# Altium PCB LED.PcbDoc
Units mm, origin at the board's own origin, x right, y up, seen from the top; angles counter-clockwise.
Board outline 30 x 30 mm, 2 copper layers (Top Layer, Bottom Layer), stack 1.671 mm thick; 5 components, 4 nets, 10 pads, 1 vias.
Unrouted connection lines stored in the file: 1.
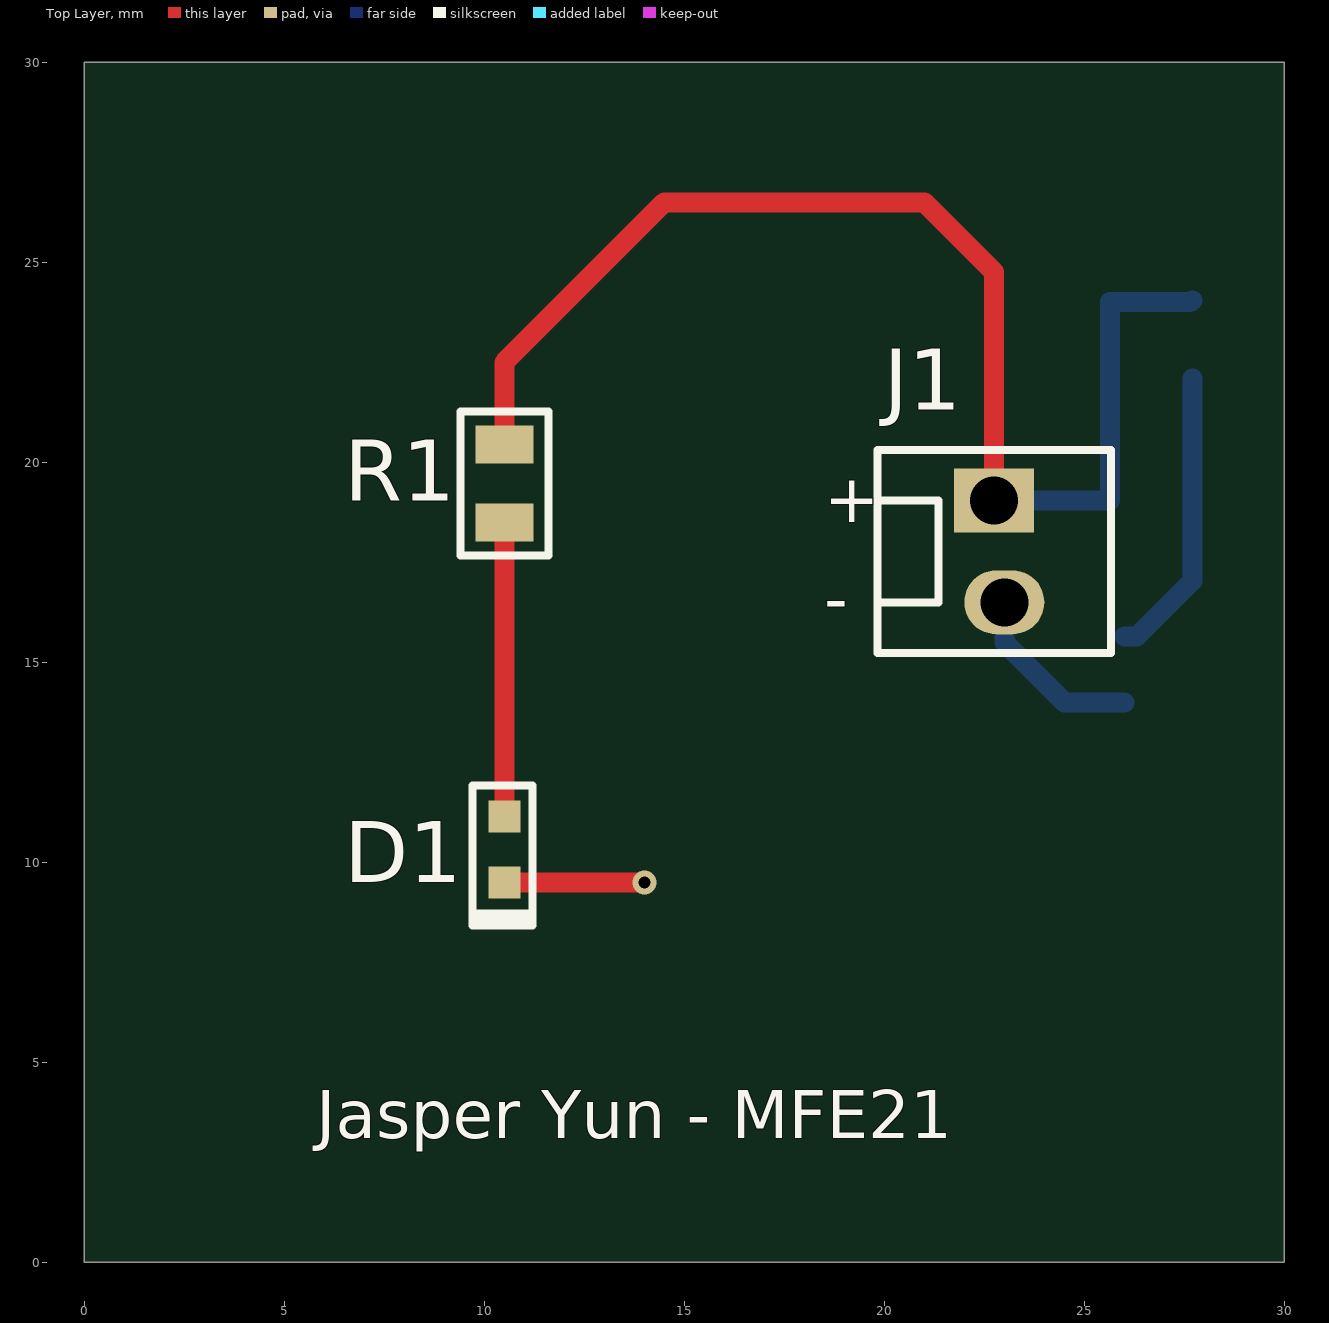
[diagram p0: Top Layer view]
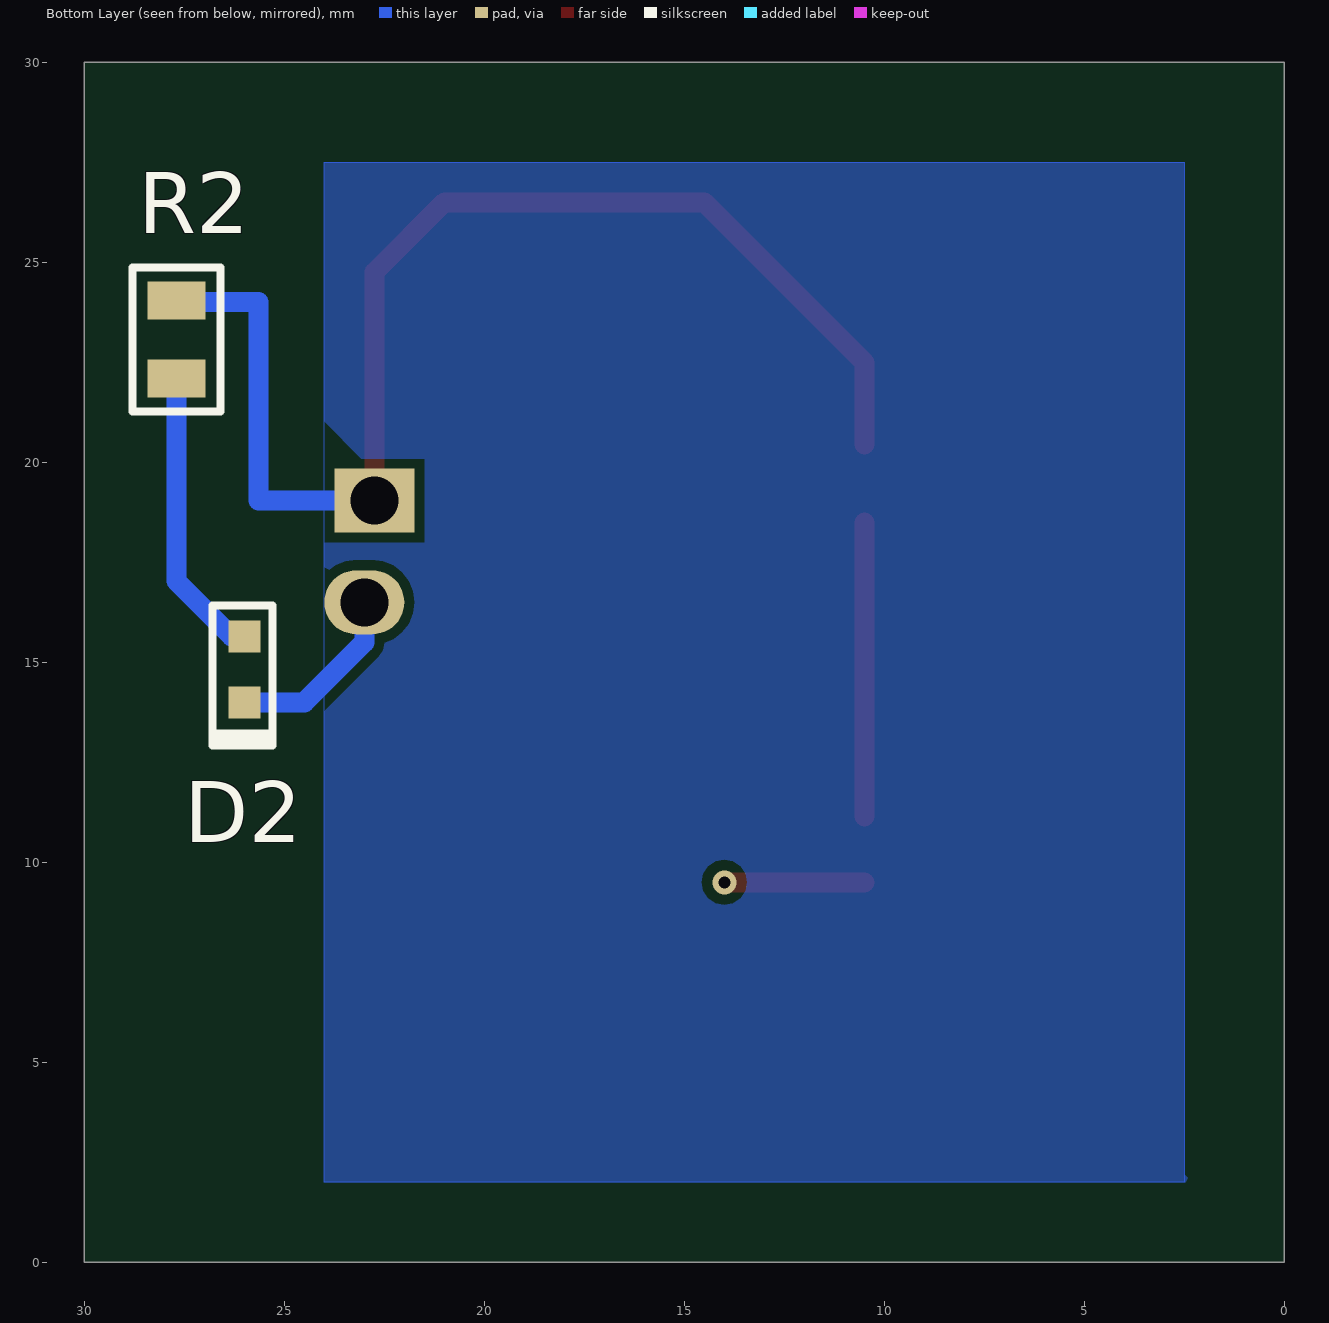
[diagram p1: Bottom Layer view, seen from below]
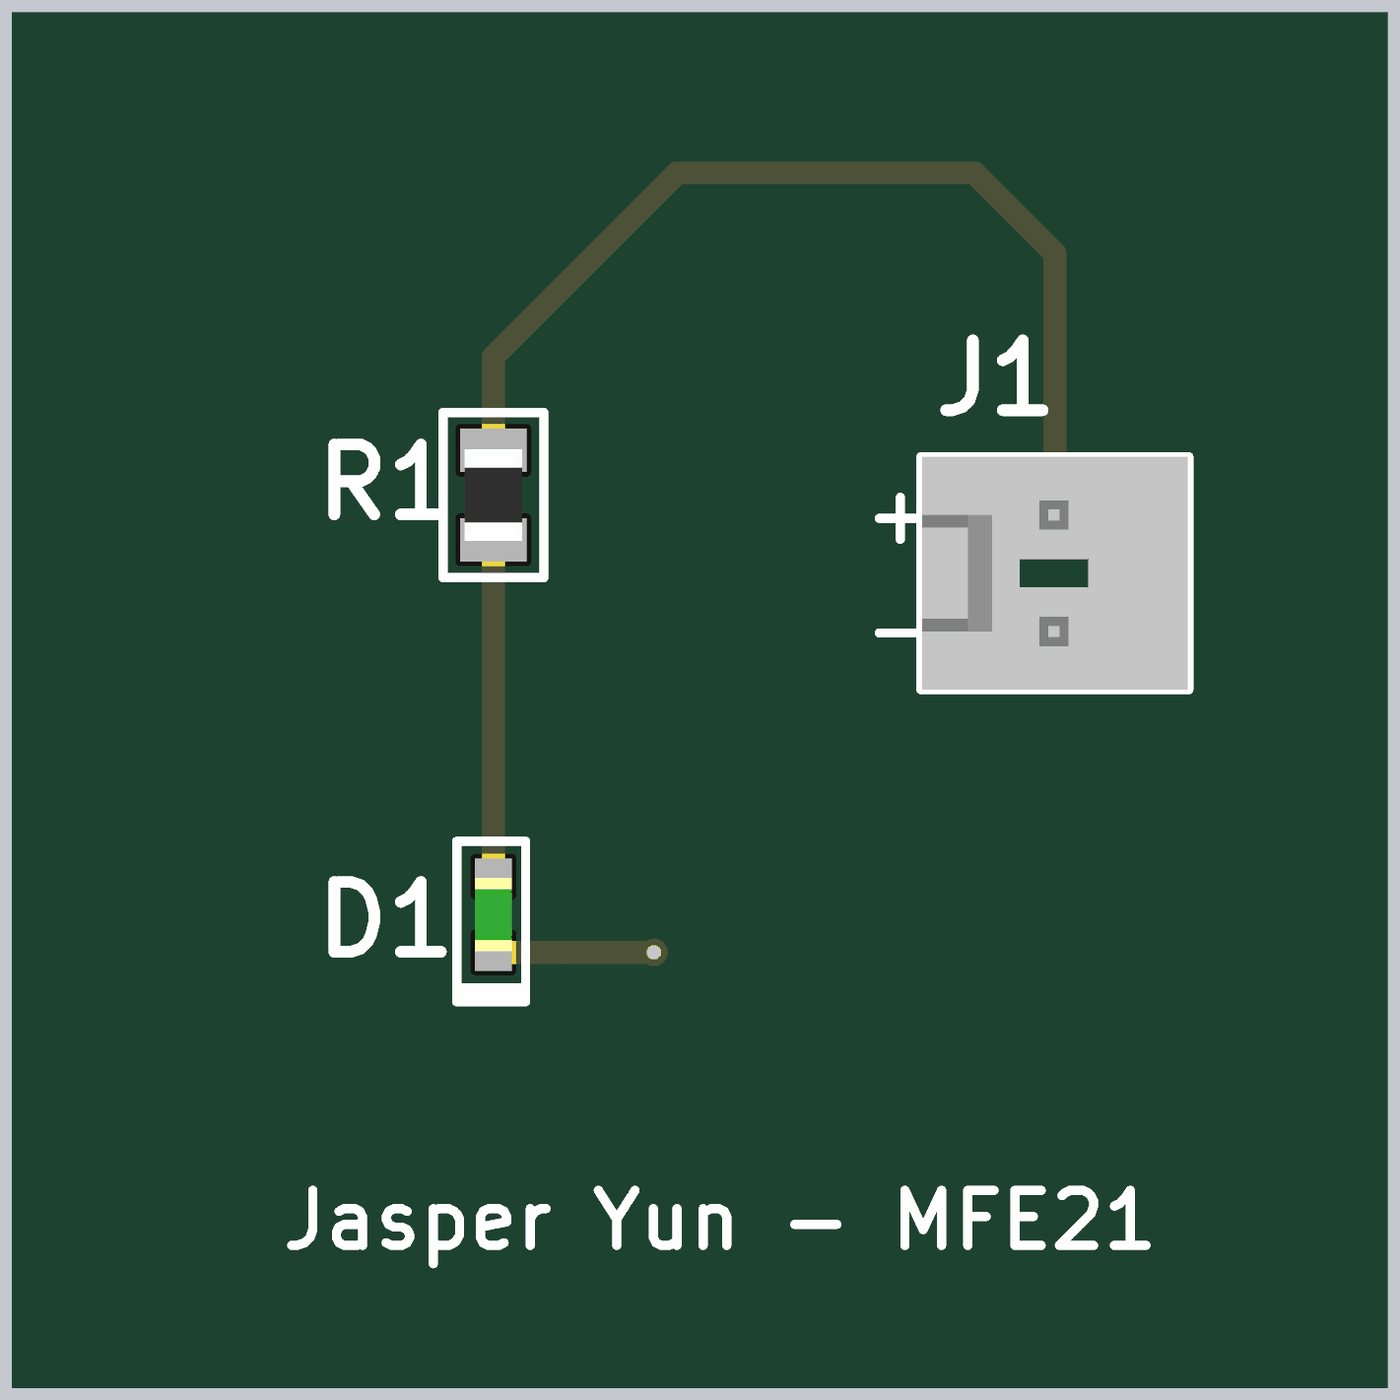
[diagram p2: 3D render of the assembled board from above, using the file's embedded part models]

## Layer stack, top to bottom
Top Solder: solder mask 0.0102, Solder Resist, Dk 3.5
Top Layer: signal copper 0.0356
Dielectric 1: dielectric 1.6, FR-4, Dk 4.8
Bottom Layer: signal copper 0.0356
Bottom Solder: solder mask 0.0102, Solder Resist, Dk 3.5

## Board outline
0,30 30,30 30,0 0,0

## Design rules (kind name [scope] priority, off if disabled: settings)
Clearance [All] p1: gap=0.254 ignorepadtopadclearanceinfootprint=FALSE except(0: Arc-Hole Track-Hole SMDPad-Hole THPad-Hole Via-Hole Fill-Hole Poly-Hole Region-Hole Text-Hole)
PolygonConnect [All] p1: connectstyle=Relief reliefconductorwidth=0.254 reliefentries=4 polygonreliefangle="90 Angle" airgapwidth=0.254
RoutingVias [All] p1: holewidth=0.3 width=0.6 viastyle="Through Hole" minholewidth=0.3 minwidth=0.6 maxholewidth=0.3 maxwidth=0.6
SilkToSolderMaskClearance [IsPad] p1: minsilkscreentomaskgap=0.1 clearancetoexposedcopper=TRUE
SolderMaskExpansion [All] p1: expansion=0.102
Width [All] p1: maxlimit=1 minlimit=0.3 preferedwidth=0.5
29 further rules are at their usual default settings.

## Components (designator, comment, footprint, x,y, rotation, side; value= is the part's Value field where it differs from the comment)
D1 "AMBER" LED0603A 10.5,10.325 r90 top
D2 "AMBER" LED0603A 26,14.825 r90 bottom
J1 "1x2 Header" HDR1X2 22.746,19.04 r0 top
R1 "360R" R0805 10.5,19.475 r90 top
R2 "360R" R0805 27.7,23.075 r90 bottom

## Footprints (in the part's own frame and the unit in brackets; to place one, negate y for a bottom-side part, rotate by r counter-clockwise, add the part's x,y. Pads: shape width x height; smd on the part's side, far side on the other; paste and mask are expansions set on the pad)
HDR1X2 [mm]
  rect 2x1.6 hole 1.2: 1(0,0)
  oval 2x1.6 hole 1.2: 2(0.254,-2.54)
  silkscreen extent -2.92,-3.81 2.92,1.27, body extent -2.9,-3.81 2.9,1.27, height 11.71
LED0603A [mm]
  rect 0.8x0.8 smd: 1(-0.825,0) 2(0.825,0)
  silkscreen extent -1.9,-0.7 1.6,0.8, body extent -0.8,-0.4 0.8,0.4, height 0.4
R0805 [mm]
  rect 0.95x1.45 smd: 1(-0.975,0) 2(0.975,0)
  silkscreen extent -1.8,-1.1 1.8,1.1, body extent -1,-0.62 1,0.62, height 0.61

## Part data
D1 D2: library part LNJ437W84RA, "LED AMBER ESS II SMD", Case/Package=0603, Case Code (Metric)=1608, Color=Orange, Forward Current=5mA, Forward Voltage=1.95V, Manufacturer="Panasonic SSG", Max Operating Temperature=85°C, Max Power Dissipation=55mW, Min Operating Temperature=-30°C, Package Quantity=5000, Reverse Voltage=4V, Supplier Part Number 1=LNJ437W84RADKR-ND, Case Code (Imperial)=0603, Category=Optoelectronics, ComponentLink1Description=http://www.mouser.com/ds/2/315/LNJ437W84RA_AEK-226228.pdf?src-supplier=Mouser, ComponentLink1URL=http://www.mouser.com/ds/2/315/LNJ437W84RA_AEK-226228.pdf?src-supplier=Mouser, ComponentLink2Description=http://www.semicon.panasonic.co.jp/ds4/LNJ437W84RA_AEK.pdf?src-supplier=Element14, ComponentLink2URL=http://www.semicon.panasonic.co.jp/ds4/LNJ437W84RA_AEK.pdf?src-supplier=Element14, Dominant Wavelength=590nm, Height=0.2mm, Illumination Color=Orange, Lead Free="Lead Free", Length=1.6mm, Lens Style=Rectangular, Luminous Intensity=25mcd, Manufacturer Part Number=LNJ437W84RA, Mount="Surface Mount", Number of LEDs=1, Number of Pins=2, Packaging="Tape and Reel", Pricing 1="1=0.32, 10=0.212, 100=0.1521, 500=0.12762, 1000=0.11988 (USD)", REACH SVHC="No SVHC", Stock 1=200969, Supplier 1=Digi-Key, Test Current=5mA, Wavelength=590nm, Width=0.8mm
J1: library part "22-29-2021 (2)", "Headers & Wire Housings 2 PIN F/LK HEADER", Color=White, Flammability Rating="UL94 V-0", Insulation Color=Natural, Manufacturer=Molex, Manufacturer Part Number=22-29-2021, Max Operating Temperature=80°C, Supplier Part Number 1=WM2744-ND, Voltage Rating (DC)=250V, Category=Connectors, ComponentLink1Description=https://www.molex.com/pdm_docs/sd/022292021_sd.pdf?src-supplier=Digi-Key, ComponentLink1URL=https://www.molex.com/pdm_docs/sd/022292021_sd.pdf?src-supplier=Digi-Key, Connector Type="Header,Male Pin", Contact Material=Brass, Contact Mating Length=0.295inch, Contact Plating=Gold, Contact Post Length=0.14inch, Contact Shape=Square, Fastening Type=Friction, Gender=Male, Glow Wire Compliant=Non-compliant, Halogen Free="Low Halogen", Insulation Height=0.461inch, Insulation Material=Nylon, Lead Free="Lead Free", Mount="Through Hole", Number of Positions=2, Number of Rows=1, Packaging=Bag, Pricing 1="1=0.48, 10=0.452, 100=0.3163, 500=0.27112, 1000=0.22593, 5000=0.19365, 10000=0.18074 (USD)", Stock 1=2431, Supplier 1=Digi-Key, Termination=Solder
R1 R2: library part CRCW0805360RFKEA, "RES SMD 360 OHM 1% 1/8W 0805", Case/Package=0805, Case Code (Metric)=2012, Manufacturer=Vishay, Max Operating Temperature=155°C, Max Power Dissipation=125mW, Min Operating Temperature=-55°C, Package Quantity=10, Supplier Part Number 1=541-360CDKR-ND, Temperature Coefficient=100ppm/°C, Tolerance=1%, Voltage Rating=150V, Case Code (Imperial)=0805, Category=Resistors, ComponentLink1Description=http://www.vishay.com/docs/20035/dcrcwe3.pdf?src-supplier=Digi-Key, ComponentLink1URL=http://www.vishay.com/docs/20035/dcrcwe3.pdf?src-supplier=Digi-Key, Composition="Thick Film", Contact Plating=Tin, Depth=1.25mm, Features="Automotive AEC-Q200", Height=0.45mm, Lead Free="Lead Free", Length=2mm, Manufacturer Part Number=CRCW0805360RFKEA, Military Standard=Not, Number of Pins=2, Number of Terminals=2, Number of Terminations=2, Packaging="Tape and Reel", Power Rating=125mW, Pricing 1="1=0.1, 10=0.066, 100=0.0267, 1000=0.01199, 2500=0.01041 (USD)", Radiation Hardening=No, REACH SVHC=Unknown, Resistance=360R, Stock 1=18934, Supplier 1=Digi-Key, Termination=SMD/SMT, Voltage Rating (DC)=150V, Weight=0.000194oz, Width=0.049inch

## Via types
v1: diameter 0.6, hole 0.3, Top Layer to Bottom Layer, tented both sides, 1 vias

## Nets (pads, with @x,y where several pads share a name; then routed paths per layer and width w, separated by ;. In a path a pad name is that pad's centre, name@x,y a point inside that pad or via, vN(x,y) a via of type N, cw(c..) or ccw(c..) an arc to the next point about the centre after c; other vN are vias at no path point)
+3V3: J1.1 R1.2 R2.2 | length 32.4
  Top Layer w0.5: R1.2 10.5,22.5 14.5,26.5 21,26.5 22.746,24.754 J1.1
  Bottom Layer w0.5: J1.1@22.746,19.146 J1.1 25.64,19.04 25.64,24.01 27.66,24.01 R2.2
"Diode 1": D1.2 R1.1 | length 7.4
  Top Layer w0.5: D1.2 R1.1
"Diode 2": D2.2 R2.1 | length 7.3
  Bottom Layer w0.5: D2.2 26.318,15.65 27.7,17.032 R2.1
Ground: D1.1 D2.1 J1.2 | length 8.1
  Top Layer w0.5: D1.1 v1(14,9.5)
  Bottom Layer w0.5: J1.2 23,15.5 24.5,14 D2.1

## Polygon pours and split planes (outlines as drawn)
Ground on Bottom Layer "Bottom Layer-Ground 1" (solid, pour order 8): 2.5,2 24,2 24,27.5 2.5,27.5
no net on Bottom Layer "Bottom Layer-No Net" (solid, pour order 0): 2.5,2.198 2.302,2 24,2 24,27.5 2.5,27.5
Ground on Bottom Layer "Bottom Layer-Ground" (solid, pour order 10): 35,11

## Silkscreen, mask and mechanical layers (free items; w line width, h text height)
Top Overlay:
  text "+" at 18.5,18.5 h1.2
  text "-" at 18.5,16 h1.2
  text "Jasper Yun - MFE21" at 5.8,3.1 h1.2
Board Outline:
  the board outline again, w0.1